# EAGLE board board (EAGLE 7.5.0)
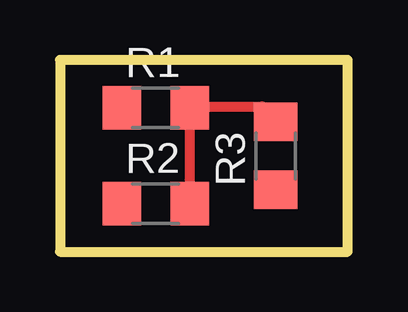
[diagram p0: board, top side]
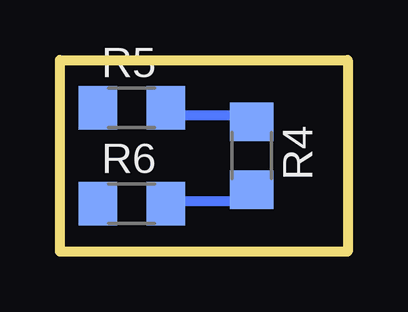
[diagram p1: board, bottom side, seen from below]

Size 12 x 8 mm. Coordinates in mm from the lower left corner, seen from the top.
Outline: 0,0 12,0 12,8 0,8 0,0
Copper layers (1*16): Top 0.035mm / dielectric 1.5mm / Bottom 0.035mm
Design rules "default": minimum track width 10mil, minimum drill 24mil, track to track 8mil, track to pad 8mil, pad to pad 8mil, via to via 8mil, smd to smd 8mil, copper to edge 40mil, drill to drill 8mil, minimum pad ring 10mil, minimum via ring 8mil, stop-mask expansion 4mil, vias tented up to drill 0mil, thermal gap 10mil

## Footprints (pad centres in the part's own frame; a part is rotated, then mirrored left to right if it is on the bottom)
R1206 = smd 1.6 x 1.803: 1 -1.422,0; 2 1.422,0

## Placement (x,y rotation side)
R1  [R1206]  4,6 0 top
R2  [R1206]  4,2 0 top
R3  [R1206]  9,4 90 top
R4  [R1206]  4,4 270 bottom
R5  [R1206]  9,6 0 bottom
R6  [R1206]  9,2 0 bottom

## Library data of the parts
R1-R6 = eagle-ltspice

## Tracks (layer width: path | path; a pad name or v marks a point on that pad's centre or on a via)
S$1
  Top 0.406: 5.42,2.08 5.42,5.91 5.57,6.06 8.43,6.06 9.05,5.44
S$2
  Bottom 0.406: 7.46,2.12 4.58,2.12 4.14,2.56
S$3
  Bottom 0.406: 4.47,5.67 6.88,5.67 7.35,6.14